# Altium PCB Temp Sensor Board.PcbDoc
Units mm, origin at the board's own origin, x right, y up, seen from the top; angles counter-clockwise.
Board outline 8.41 x 7.71 mm, 2 copper layers (Top Layer, Bottom Layer), stack 1.575 mm thick; 3 components, 5 nets, 16 pads, 7 vias.
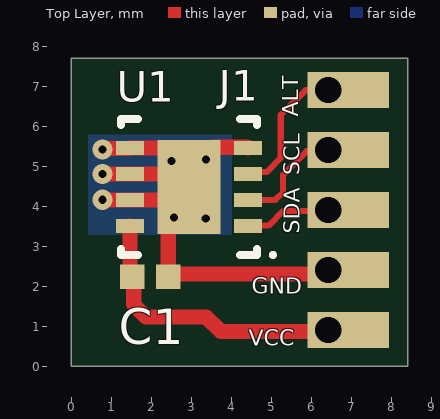
[diagram p0: Top Layer view]
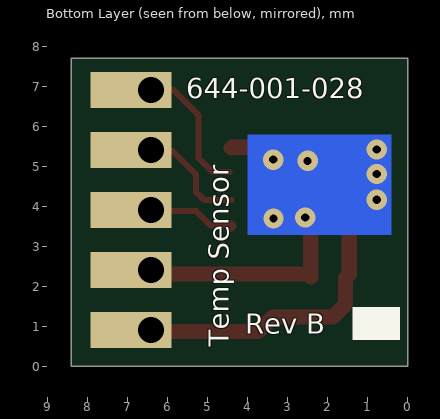
[diagram p1: Bottom Layer view, seen from below]

## Layer stack, top to bottom
Top Solder: solder mask 0.0102, Solder Resist, Dk 3.5
Top Layer: signal copper 0.0356
Dielectric1: core 1.5037, FR-4, Dk 4.8
Bottom Layer: signal copper 0.0356
Bottom Solder: solder mask 0.0102, Solder Resist, Dk 3.5

## Board outline
-0.002,0.002 8.41,0.002 8.41,7.707 -0.002,7.707

## Design rules (kind name [scope] priority, off if disabled: settings)
Clearance "GND Plane Clearance" [InNamedPolygon('Top Layer-No Net')] p1: gap=0.381 ignorepadtopadclearanceinfootprint=FALSE except(0: Arc-Hole Track-Hole SMDPad-Hole THPad-Hole Via-Hole Fill-Hole Poly-Hole Region-Hole Text-Hole)
Clearance "Ground Plane Clearance" [InNamedPolygon('Top Layer-No Net')] p2: gap=0.254 ignorepadtopadclearanceinfootprint=FALSE except(0: Arc-Hole Track-Hole SMDPad-Hole THPad-Hole Via-Hole Fill-Hole Poly-Hole Region-Hole Text-Hole; 0.381: Arc-Arc Arc-Track Arc-SMDPad Arc-THPad Arc-Via Arc-Fill Arc-Poly Arc-Region Arc-Text Track-Track Track-SMDPad Track-THPad Track-Via Track-Fill Track-Poly Track-Region Track-Text)
Clearance "Gimme some room" [InNamedPolygon('Top Layer-No Net')] p3: gap=0.508 ignorepadtopadclearanceinfootprint=FALSE except(0: THPad-Fill THPad-Poly THPad-Region THPad-Text THPad-Hole Via-Text Via-Hole Fill-Fill Fill-Poly Fill-Region Poly-Poly Poly-Region Region-Region)
Clearance [All] p4: gap=0.152 ignorepadtopadclearanceinfootprint=FALSE
HoleSize [All] p1: absolutevalues=TRUE maxlimit=3 minlimit=0.203 maxpercent=80.000 minpercent=20.000
MinimumSolderMaskSliver [All] p1: minsoldermaskwidth=0.02
PolygonConnect [InNet('GND') vs InNet('GND')] p1: thpad.connectstyle=Direct thpad.reliefconductorwidth=0.254 thpad.reliefentries=4 thpad.polygonreliefangle="90 Angle" thpad.airgapwidth=0.254 smdpad.connectstyle=Relief smdpad.reliefconductorwidth=0.254 smdpad.reliefentries=4 smdpad.polygonreliefangle="90 Angle" smdpad.airgapwidth=0.254 via.connectstyle=Direct via.reliefconductorwidth=0.254 via.reliefentries=4 via.polygonreliefangle="90 Angle" via.airgapwidth=0.254
RoutingVias [All] p1: holewidth=0.305 width=0.457 viastyle="Through Hole" minholewidth=0.203 minwidth=0.508 maxholewidth=0.711 maxwidth=1.27
SilkToSolderMaskClearance [IsPad] p1: minsilkscreentomaskgap=0.1 clearancetoexposedcopper=TRUE
SolderMaskExpansion [All] p1: expansion=0.102 istentingtop=FALSE
Width [All] p1: maxlimit=1.27 minlimit=0.152 preferedwidth=0.254
27 further rules are at their usual default settings.

## Classes and differential pairs
component class "Temp Sensor Board_TOC": BarePCB

## Components (designator, comment, footprint, x,y, rotation, side; value= is the part's Value field where it differs from the comment)
C1 "1.0µF" CAPC0402(1005)60_N 1.97,2.245 r180 top
J1 "Temp Board Temp Sensor Contacts" "Temp Board Temp Sensor Contacts-Footprint-1" 6.42,3.911 r180 top
U1 "MAX31725MTA+T" MAXM-T833+2_V 2.938,4.487 r180 top

## Footprints (in the part's own frame and the unit in brackets; to place one, negate y for a bottom-side part, rotate by r counter-clockwise, add the part's x,y. Pads: shape width x height; smd on the part's side, far side on the other; paste and mask are expansions set on the pad)
CAPC0402(1005)60_N [mm] "Chip Capacitor, Body 1.0x0.5mm, Height 0.6mm, IPC Medium Density"
  rect 0.62x0.62 smd: 1(-0.45,0) 2(0.45,0)
  body extent -0.55,-0.3 0.55,0.3, height 0.6
MAXM-T833+2_V [mm] "SON, 8-Leads, Body 3x3 mm, Pitch 0.65mm, Thermal Pad 2.3x1.5mm"
  rect 0.7x0.35 smd: 1(-1.475,0.975) 2(-1.475,0.325) 3(-1.475,-0.325) 4(-1.475,-0.975) 5(1.475,-0.975) 6(1.475,-0.325) 7(1.475,0.325) 8(1.475,0.975)
  rect 1.58x2.35 smd: 9(0,0)
  silkscreen extent -2.15,-1.7 1.7,1.75, body extent -1.55,-1.55 1.55,1.55, height 0.8
"Temp Board Temp Sensor Contacts-Footprint-1" [mm]
  rect 2.032x0.9 hole 0.66 copper offset -0.5,0: 1(0,3) 2(0,1.5) 3(0,0) 4(0,-1.5) 5(0,-3)

## Part data
C1: library part CMP-13694-A.6, "CAP CER 1UF 10V 10% X5R 0402", Manufacturer=Yageo, Manufacturer 2="Samsung Electro-Mechanics", Manufacturer 3="AVX Corporation", Manufacturer Part Number=CC0402KRX5R6BB105, Manufacturer Part Number 2=CL05A105KP5NNNC, Manufacturer Part Number 3=0402ZD105KAT2A, Operating Temperature="-55°C ~ 85°C", Supplier Part Number 1=311-1439-1-ND, Temperature Coefficient=X5R, Tolerance=±10%, Voltage - Rated=10V, Capacitance=1.0µF, Datasheet=http://www.samsungsem.com/kr/support/product-search/mlcc/__icsFiles/afieldfile/2019/05/10/19-CL05A105KP5NNNC.pdf, Supplier 1=Digi-Key, Supplier 2=Digi-Key, Supplier 3=Digi-Key, Supplier Part Number 2=1276-1076-1-ND, Supplier Part Number 3=478-4596-1-ND
J1: library part CMP-23773-A.2, "Temp Sensor Contact Pads"
U1: library part CMP-23703-A.4, "SENSOR DIGITAL -55C-150C 8TDFN", Manufacturer="Maxim Integrated", Max Operating Temperature=150°C, Max Supply Voltage (DC)=3.7V, Min Operating Temperature=-55°C, Min Supply Voltage (DC)=2.5V, Package Quantity=2500, Supplier Part Number=MAX31725MTA+TCT-ND, Contact Plating=Tin, Datasheet=https://datasheets.maximintegrated.com/en/ds/MAX31725.pdf, Interface=I2C,SMBus,2-Wire, Manufacturer Part Number=MAX31725MTA+T, Number of Pins=8, Operating Supply Voltage=3.7V, Output Type=Digital,I2C, Packaging="Tape and Reel", Resolution=16b, Supplier=Digi-Key

## Via types
v1: diameter 0.508, hole 0.203, Top Layer to Bottom Layer, tented both sides, 7 vias

## Nets (pads, with @x,y where several pads share a name; then routed paths per layer and width w, separated by ;. In a path a pad name is that pad's centre, name@x,y a point inside that pad or via, vN(x,y) a via of type N, cw(c..) or ccw(c..) an arc to the next point about the centre after c; other vN are vias at no path point)
ALERT: J1.5 U1.3 | length 3.5
  Top Layer w0.152: U1.3@4.461,4.86 4.881,4.86 5.233,5.212 5.233,6.287 5.853,6.907 6.285,6.907 J1.5@6.418,6.775
GND: C1.1 J1.2 U1.4 U1.5 U1.6 U1.7 U1.9 | length 14.5
  Top Layer w0.381: v1@0.741,4.807 0.745,4.811 U1.6 U1.6 2.887,4.812 U1.9@2.938,4.863 ; v1@0.755,4.162 U1.7 2.613,4.162 U1.9 U1.9@2.938,4.863 ; v1(0.775,5.422) 0.809,5.422 0.834,5.447 1.447,5.447 U1.5 2.338,5.462 2.503,5.298 v1(2.503,5.14) 2.661,5.14 U1.9@2.938,4.863 ; C1.1 C1.1@2.423,2.247 ; U1.9@2.423,3.535 C1.1@2.423,2.247 ; U1.4 4.397,5.478 3.543,5.478 3.3,5.235 2.938,4.872 U1.9@2.938,4.863 ; J1.2@6.438,2.38 6.37,2.312 2.488,2.312 C1.1@2.423,2.247
  other v1: 3.358,3.7 2.563,3.722 0.775,4.166 0.775,4.81 3.364,5.171
SCL: J1.4 U1.2 | length 2.3
  Top Layer w0.152: U1.2 5.095,4.162 5.293,4.36 5.293,4.795 5.878,5.38 J1.4@5.958,5.38
SDA: J1.3 U1.1 | length 2.3
  Top Layer w0.152: U1.1@4.423,3.522 4.93,3.522 5.298,3.89 6.45,3.89 J1.3@6.4,3.932
  Top Layer w0.254: U1.1@4.423,3.522 U1.1 U1.1@4.438,3.487
VCC: C1.2 J1.1 U1.8 | length 7.2
  Top Layer w0.381: U1.8 1.463,2.302 C1.2 1.555,2.21 1.555,1.552 1.868,1.239 3.368,1.239 3.735,0.873 6.37,0.873 J1.1@6.465,0.967

## Other copper
Bottom Layer:
  rectangle net GND: 0.41,3.287 4.01,5.795

## Silkscreen, mask and mechanical layers (free items; w line width, h text height)
Top Overlay:
  text "ALT" at 5.665,6.247 h0.4 r90
  text "SCL" at 5.713,4.775 h0.4 r90
  text "SDA" at 5.713,3.312 h0.4 r90
  text "GND" at 4.508,1.822 h0.4
  text "VCC" at 4.435,0.513 h0.4
Bottom Overlay:
  rectangle: 0.192,0.658 1.382,1.49
  text "644-001-028" at 5.533,6.707 h0.5
  text "Rev B" at 4.068,0.822 h0.5
  text "Temp Sensor" at 4.48,0.487 h0.5 r270
Board Outline:
  lines w0.1: 8.397,7.7 0,7.7 0,0 8.4,0
  lines w0.152: 8.397,0.06 8.397,7.7
Border:
  lines w0: 197.281,-72.636 197.281,-52.341 237.903,-52.341 ; 237.903,-72.636 237.903,-52.341 ; 237.903,-67.562 329.301,-67.562 ; 237.903,-62.488 329.301,-62.488 ; 237.903,-57.414 329.301,-57.414 ; 303.913,-72.636 303.913,-62.488 303.913,-57.414 ; 329.301,-52.341 237.903,-52.341
  lines w0.127: -97.407,-7.993 -92.327,-7.993 ; -97.407,61.857 -92.327,61.857 ; -97.407,131.707 -92.327,131.707 ; -25.398,-77.843 -25.398,-72.763 ; -25.398,196.477 -25.398,201.557 ; 46.484,-77.843 46.484,-72.763 ; 46.484,196.477 46.484,201.557 ; 118.493,-77.843 118.493,-72.763 ; 118.493,196.477 118.493,201.557 ; 179.453,-72.763 215.013,-72.763 ; 190.375,-77.843 190.375,-72.763 ; 190.375,196.477 190.375,201.557 ; 262.384,-77.843 262.384,-72.763 ; 262.384,196.477 262.384,201.557 ; 329.313,-7.993 334.393,-7.993 ; 329.313,61.857 334.393,61.857 ; 329.313,131.707 334.393,131.707 ; -97.407,-77.843 334.393,-77.843 334.393,201.557 -97.407,201.557 -97.407,-77.843
  lines w0.203: 118.493,176.665 329.313,176.665 ; 118.493,179.713 329.313,179.713 ; 118.493,182.761 329.313,182.761 ; 118.493,185.809 329.313,185.809 ; 118.493,188.857 329.313,188.857 ; 118.493,192.667 329.313,192.667 ; 118.493,196.477 118.493,173.617 329.313,173.617 ; 127.079,173.617 127.079,192.667 ; 138.813,173.617 138.813,192.667 ; 156.085,173.617 156.085,192.667 ; -92.327,-72.763 329.313,-72.763 329.313,196.477 -92.327,196.477 -92.327,-72.763
  text "1" at -61.814,198.128 h1.78
  text "2" at 9.958,198.128 h1.78
  text "3" at 81.713,198.128 h1.78
  text "4" at 153.875,198.128 h1.78
  text "5" at 225.858,198.128 h1.78
  text "6" at 297.867,198.128 h1.78
  text "REVISION HISTORY" at 120.525,193.683 h3.56
  text "REV" at 120.525,189.619 h3.05
  text "ECO" at 130.177,189.619 h3.05
  text "DATE" at 144.147,189.619 h3.05
  text "DESCRIPTION" at 158.117,189.619 h3.05
  text ".FAB_ECO_REV1" at 121.795,186.571 h3.05
  text ".FAB_ECO_NUM1" at 128.653,186.571 h3.05
  text ".FAB_ECO_DATE1" at 140.083,186.571 h3.05
  text ".FAB_ECO_DESC1" at 158.113,186.571 h3.05
  text ".FAB_ECO_REV2" at 121.795,183.523 h3.05
  text ".FAB_ECO_NUM2" at 128.653,183.523 h3.05
  text ".FAB_ECO_DATE2" at 140.083,183.523 h3.05
  text ".FAB_ECO_DESC2" at 158.113,183.523 h3.05
  text ".FAB_ECO_REV3" at 121.795,180.475 h3.05
  text ".FAB_ECO_NUM3" at 128.653,180.475 h3.05
  text ".FAB_ECO_DATE3" at 140.083,180.475 h3.05
  text ".FAB_ECO_DESC3" at 158.117,180.475 h3.05
  text ".FAB_ECO_REV4" at 121.795,177.427 h3.05
  text ".FAB_ECO_NUM4" at 128.653,177.427 h3.05
  text ".FAB_ECO_DATE4" at 140.083,177.427 h3.05
  text ".FAB_ECO_DESC4" at 158.117,177.427 h3.05
  text ".FAB_ECO_REV5" at 121.795,174.379 h3.05
  text ".FAB_ECO_NUM5" at 128.653,174.379 h3.05
  text ".FAB_ECO_DATE5" at 140.083,174.379 h3.05
  text ".FAB_ECO_DESC5" at 158.117,174.379 h3.05
  text "A" at -95.502,166.556 h1.78
  text "A" at 331.218,166.556 h1.78
  text "B" at -95.502,97.113 h1.78
  text "B" at 331.218,97.113 h1.78
  text "C" at -95.502,26.475 h1.78
  text "C" at 331.218,26.475 h1.78
  text "D" at -95.502,-45.204 h1.78
  text "D" at 331.218,-45.204 h1.78
  text "TITLE" at 240.442,-54.642 h2.46
  text "tm" at 233.809,-56.507 h1.1
  text ".Printout_Name" at 248.058,-56.529 h3.94
  text "DOC NUMBER" at 240.442,-59.715 h2.46
  text "REV" at 306.451,-59.715 h2.46
  text "sync" at 199.82,-60.046 h9.84
  text "roness" at 214.555,-60.046 h9.84
  text ".FABDWG_DOCNUM" at 258.213,-61.603 h3.94
  text ".FAB_CURRENT_REV" at 314.068,-61.603 h3.94
  text "ENGINEER" at 240.442,-64.789 h2.46
  text "DATE" at 306.451,-64.789 h2.46
  text "10875 dover street,  unit 200" at 206.711,-65.933 h2.46
  text ".CONTACT_NAME" at 253.136,-66.677 h3.94
  text ".Print_Date" at 314.068,-66.677 h3.94
  text "westminster, colorado, 80501, usa" at 205.156,-68.47 h2.46
  text "FILE" at 240.442,-69.863 h2.46
  text "SHEET" at 306.451,-69.863 h2.46
  text "OF" at 319.146,-69.863 h2.46
  text "www.syncroness.com" at 209.845,-71.007 h2.46
  text "1" at 314.551,-71.687 h3.94
  text ".Pcb_File_Name_No_Path" at 248.058,-71.75 h3.94
  text "1" at 324.223,-71.75 h3.94
  text "1" at -61.814,-76.192 h1.78
  text "2" at 9.958,-76.192 h1.78
  text "3" at 81.713,-76.192 h1.78
  text "4" at 153.875,-76.192 h1.78
  text "5" at 225.858,-76.192 h1.78
  text "6" at 297.867,-76.192 h1.78
Drill Drawing:
  drawing of 207 lines, arcs and shapes, not listed
  text "Layer" at 95.633,115.197 h1.52
  text "Name" at 106.044,115.197 h1.52
  text "Material" at 129.66,115.197 h1.52
  text "Thickness" at 151.498,115.197 h1.52
  text "Constant" at 168.004,115.197 h1.52
  text "Board Layer Stack" at 182.478,115.197 h1.52
  text "Top Overlay" at 106.044,112.149 h1.52
  text "Top Solder" at 106.044,109.101 h1.52
  text "Solder Resist" at 129.66,109.101 h1.52
  text "0.40mil" at 151.498,109.101 h1.52
  text "3.5" at 168.004,109.101 h1.52
  text "1" at 95.633,106.053 h1.52
  text "Top Layer" at 106.044,106.053 h1.52
  text "Copper" at 129.66,106.053 h1.52
  text "1.40mil" at 151.498,106.053 h1.52
  text "Dielectric1" at 106.044,103.005 h1.52
  text "FR-4" at 129.66,103.005 h1.52
  text "59.20mil" at 151.498,103.005 h1.52
  text "4.8" at 168.004,103.005 h1.52
  text "2" at 95.633,99.957 h1.52
  text "Bottom Layer" at 106.044,99.957 h1.52
  text "Copper" at 129.66,99.957 h1.52
  text "1.40mil" at 151.498,99.957 h1.52
  text "Bottom Solder" at 106.044,96.909 h1.52
  text "Solder Resist" at 129.66,96.909 h1.52
  text "0.40mil" at 151.498,96.909 h1.52
  text "3.5" at 168.004,96.909 h1.52
  text "Bottom Overlay" at 106.044,93.861 h1.52
  text "Symbol" at 95.633,38.997 h1.83
  text "Count" at 108.482,38.997 h1.83
  text "Hole Size" at 121.94,38.997 h1.83
  text "Plated" at 149.872,38.997 h1.83
  text "Hole Type" at 162.721,38.997 h1.83
  text "Via/Pad" at 181.36,38.997 h1.83
  text "7" at 108.482,35.187 h1.52
  text "8.00mil (0.203mm)" at 121.94,35.187 h1.52
  text "PTH" at 149.872,35.187 h1.52
  text "Round" at 162.721,35.187 h1.52
  text "Via" at 181.36,35.187 h1.52
  text "5" at 108.482,31.377 h1.52
  text "25.98mil (0.660mm)" at 121.94,31.377 h1.52
  text "PTH" at 149.872,31.377 h1.52
  text "Round" at 162.721,31.377 h1.52
  text "Pad" at 181.36,31.377 h1.52
  text "12 Total" at 108.482,27.567 h1.52